# Altium PCB PCB.PcbDoc
Units mil, origin at the board's own origin, x right, y up, seen from the top; angles counter-clockwise.
Board outline 2615 x 3200 mil, 4 copper layers (Top Layer, Layer 1, Layer 2, Bottom Layer), stack 70.112 mil thick; 29 components, 50 nets, 138 pads, 19 vias.
Unrouted connection lines stored in the file: 1.
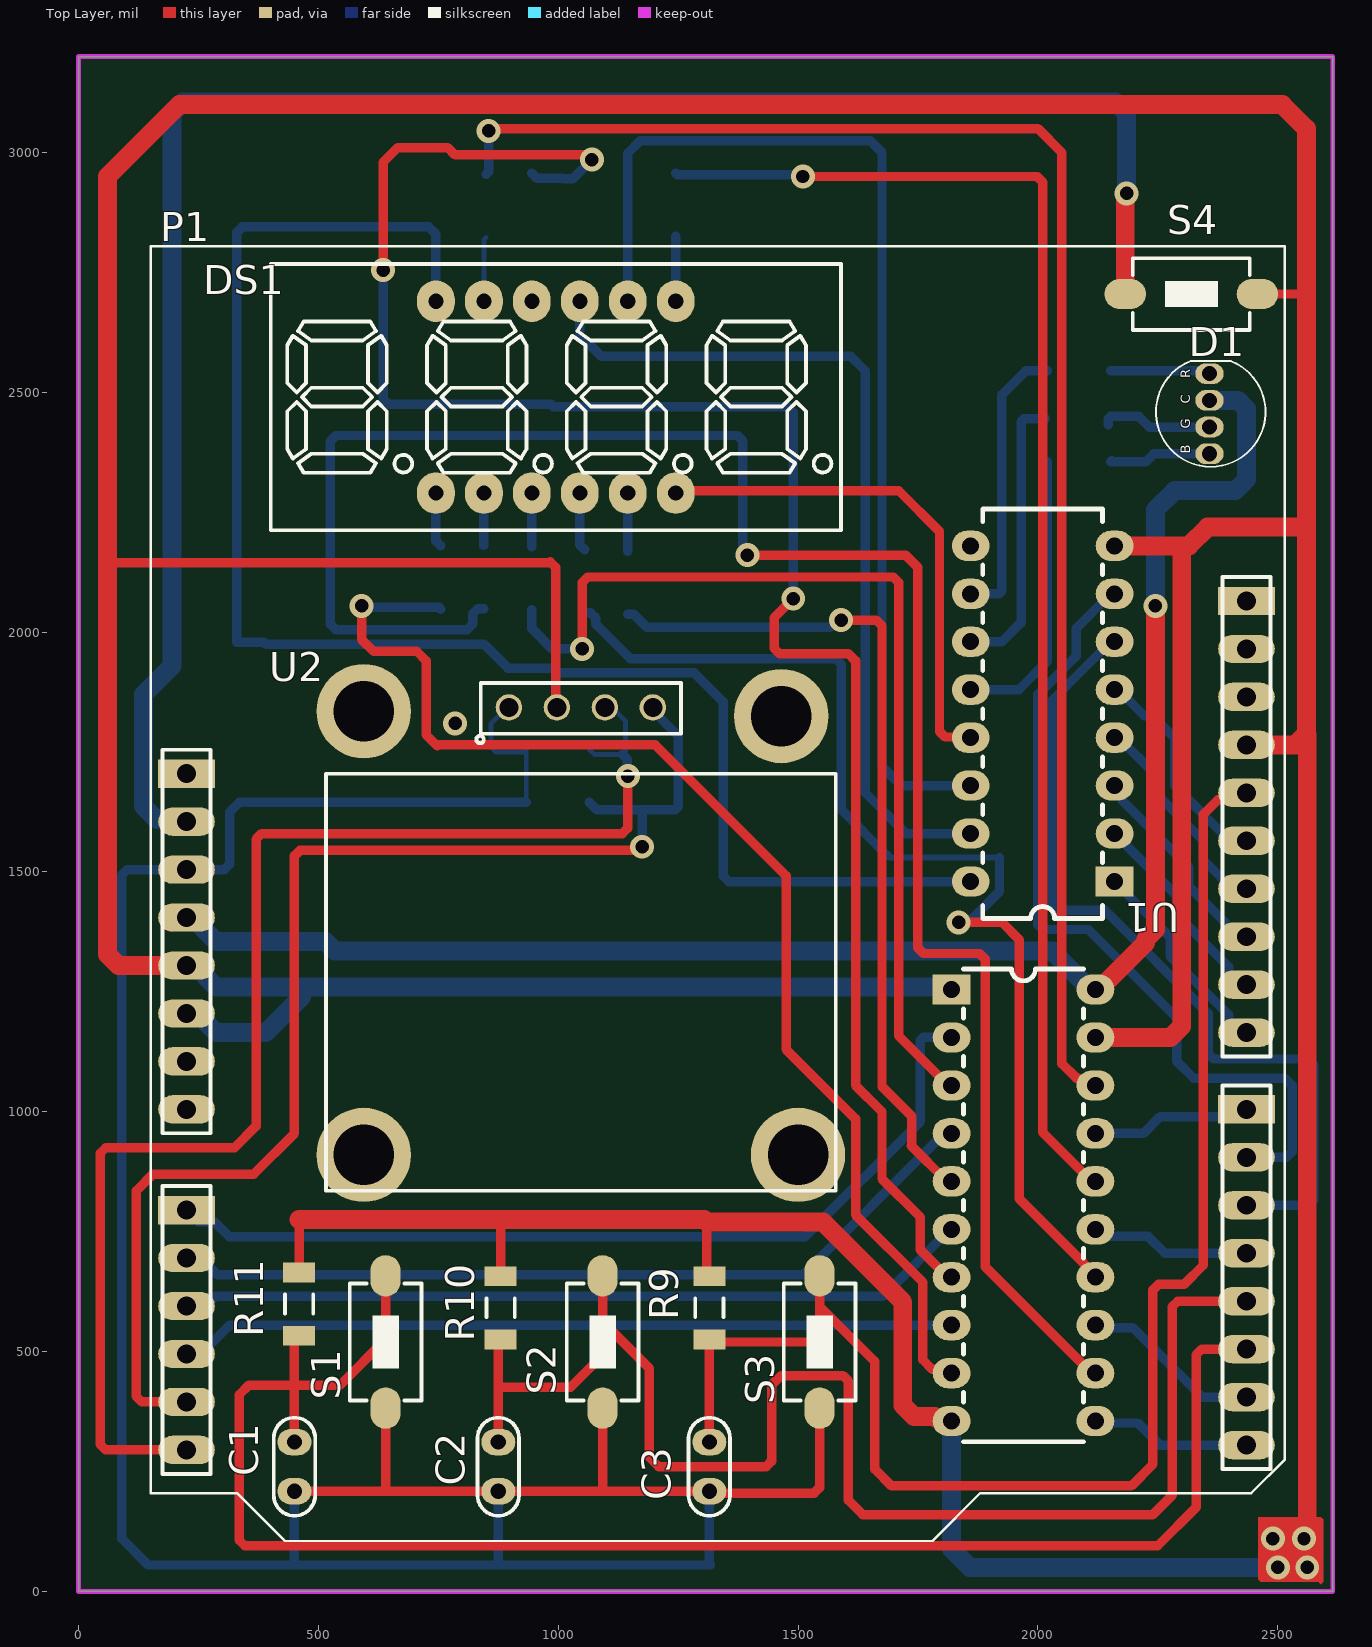
[diagram p0: Top Layer view]
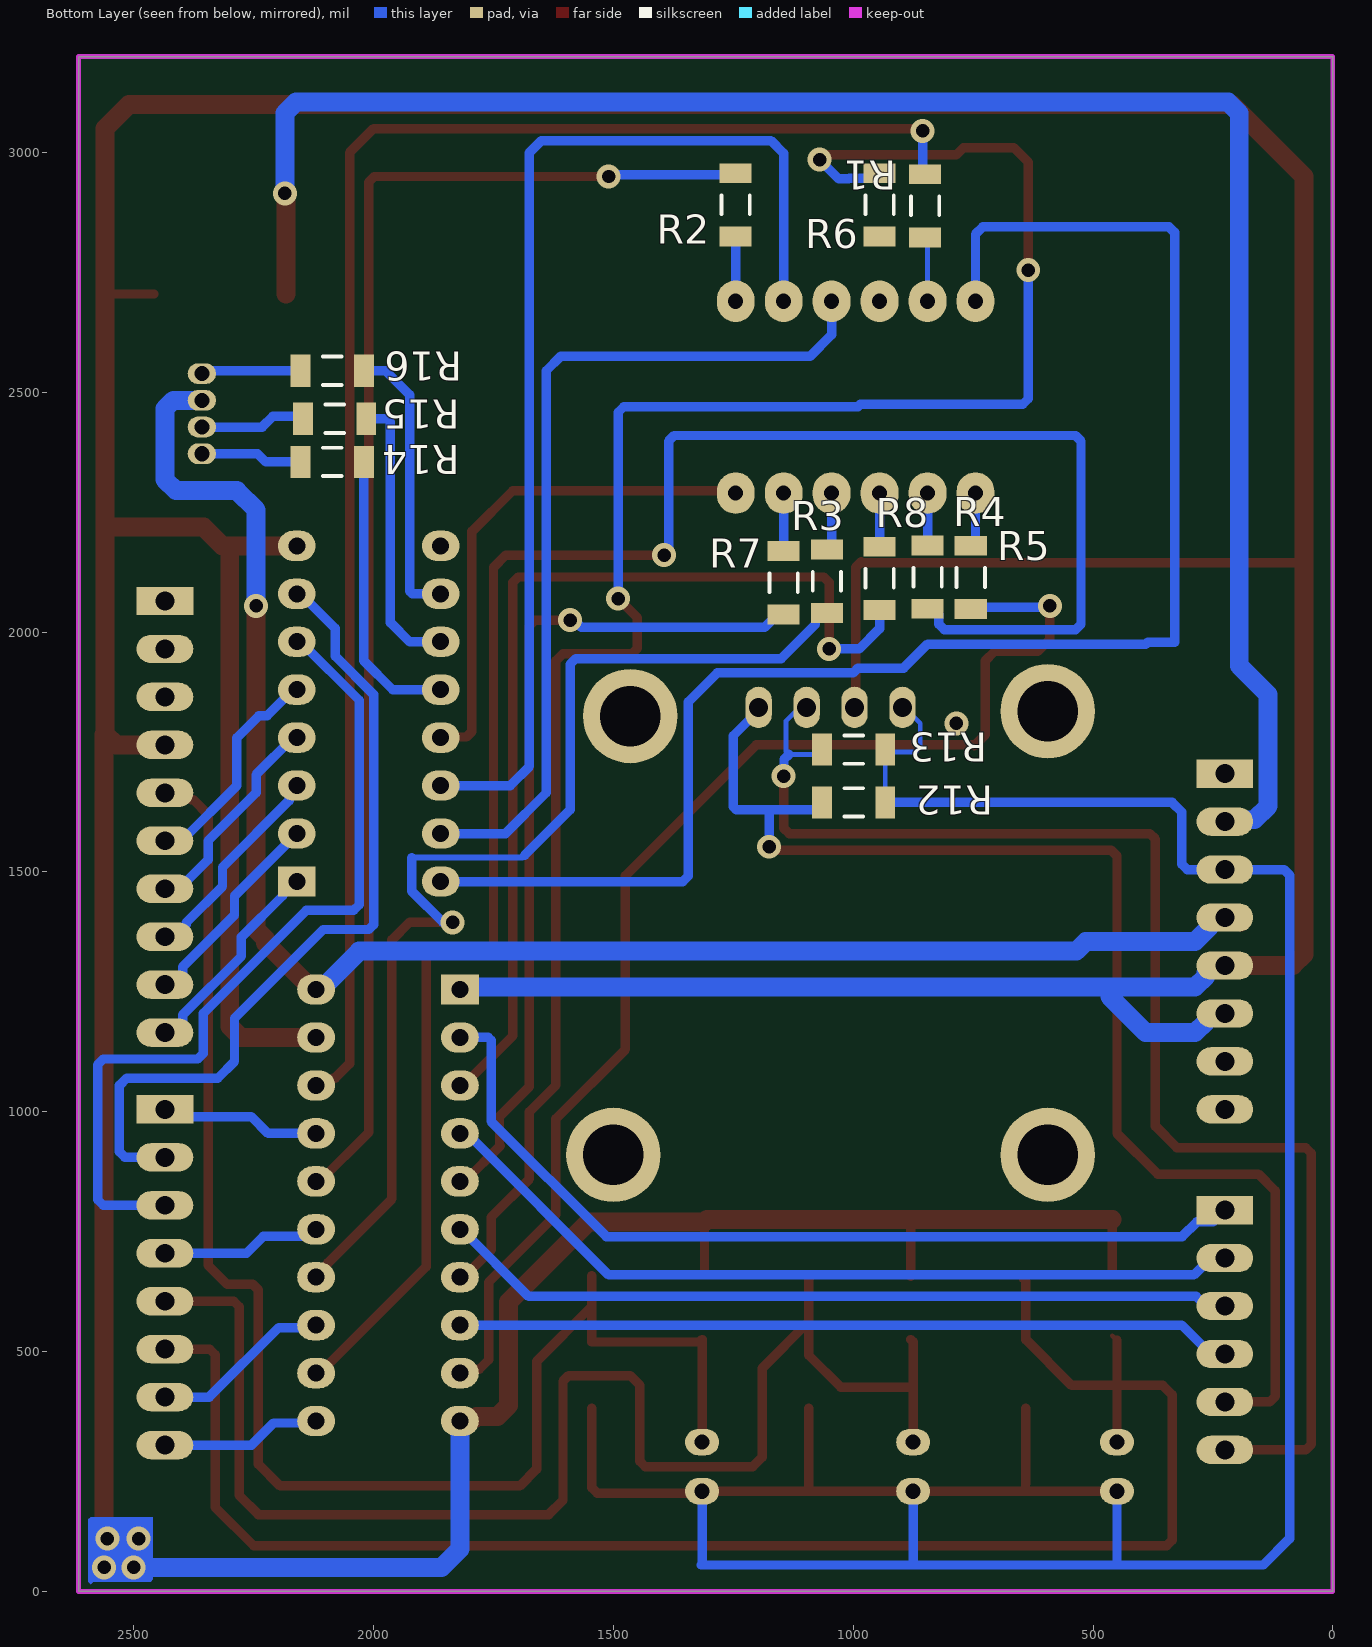
[diagram p1: Bottom Layer view, seen from below]
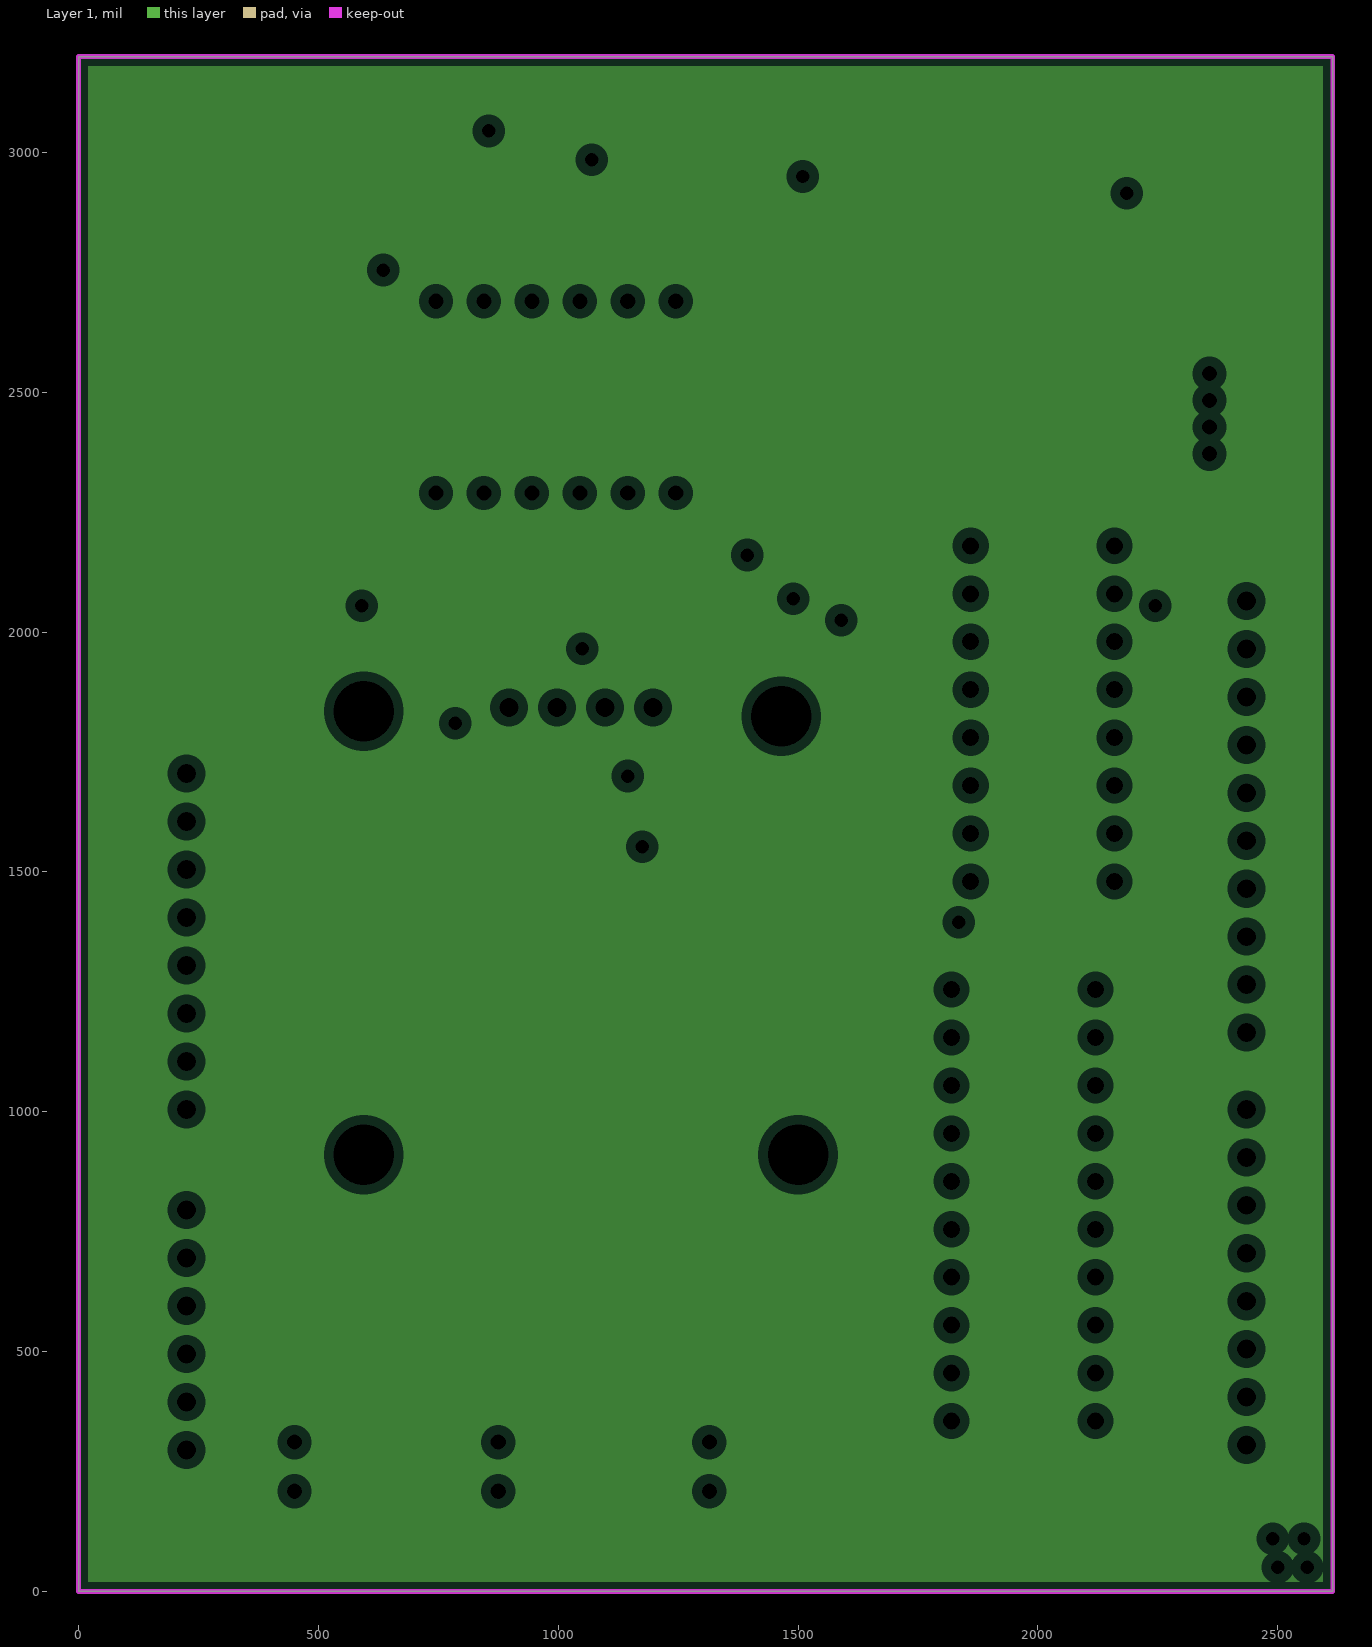
[diagram p2: Layer 1, clearances drawn from the general rule]
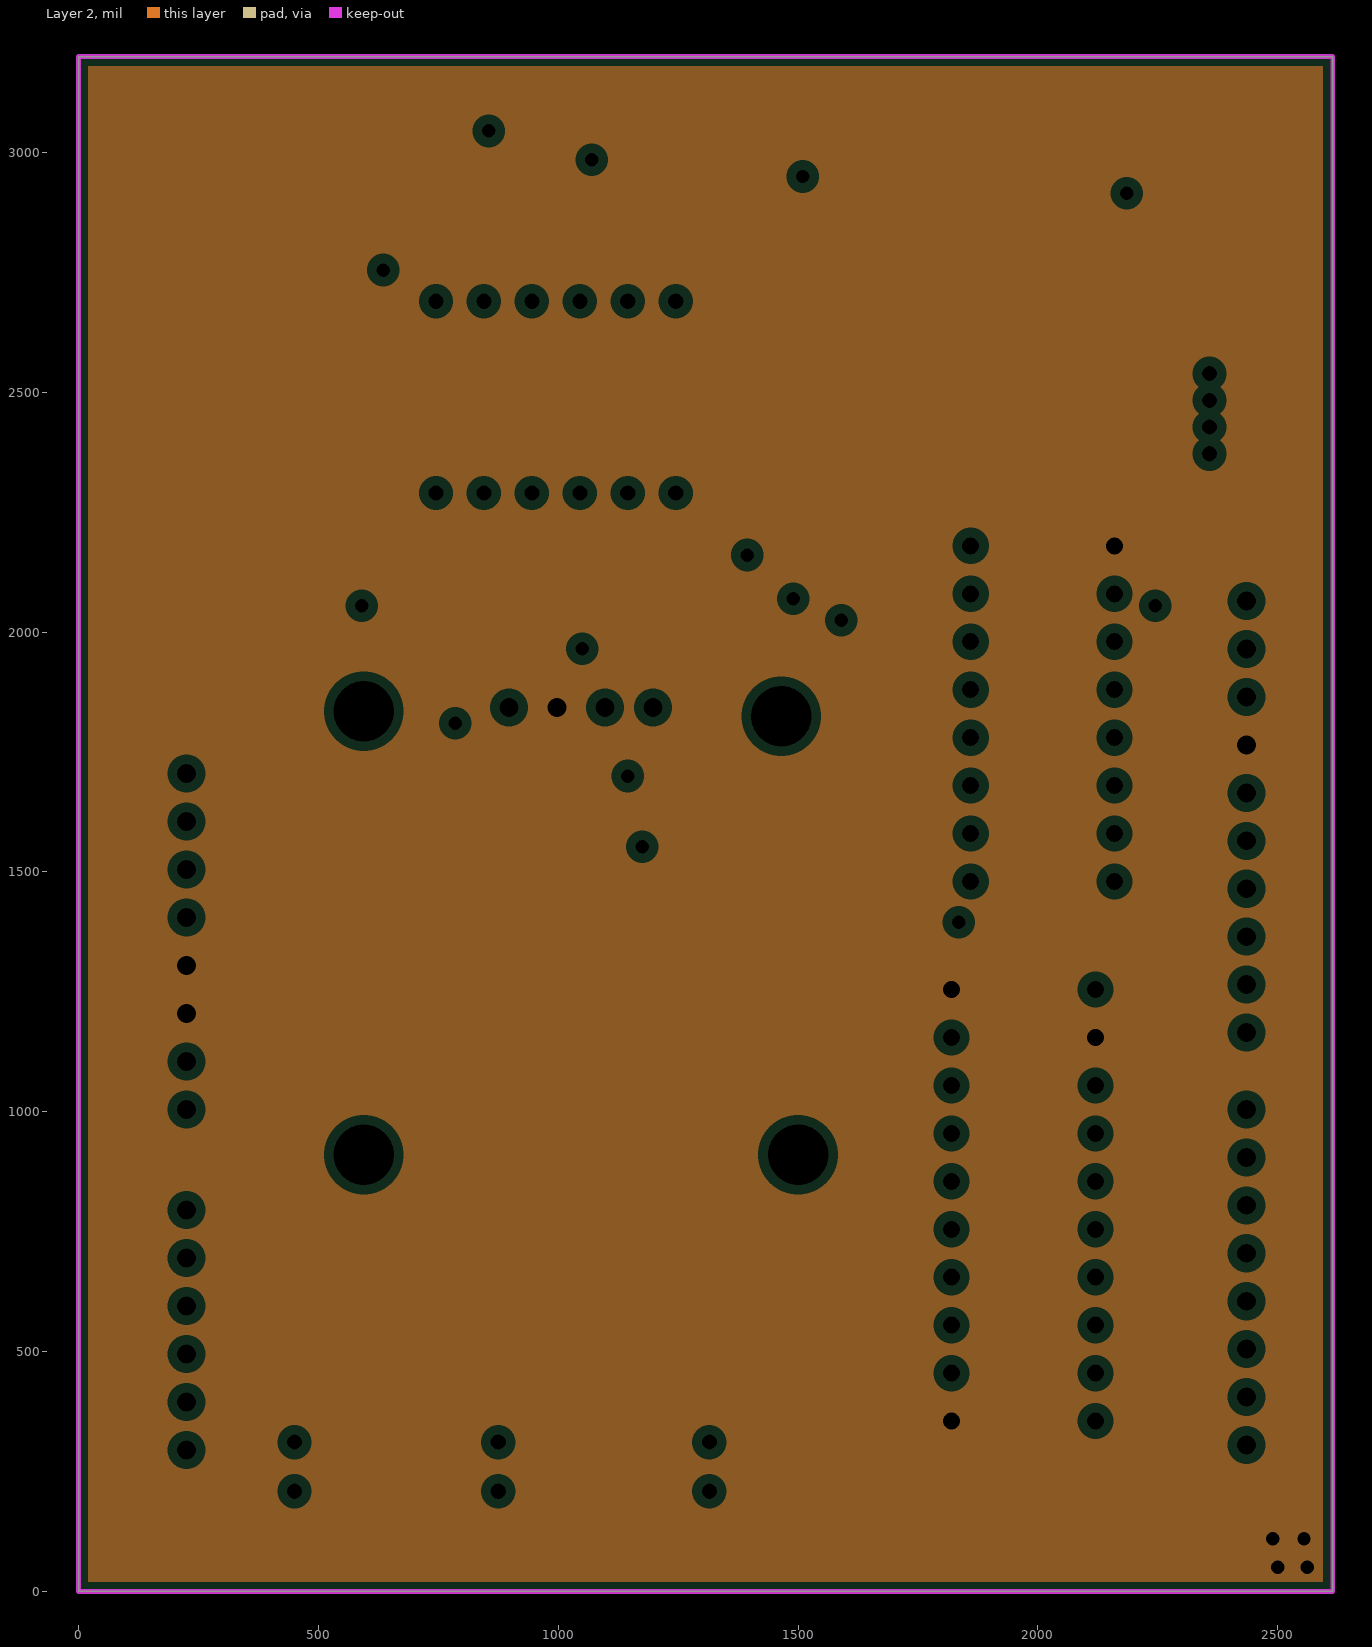
[diagram p3: Layer 2, clearances drawn from the general rule]

## Layer stack, top to bottom
Top Solder: solder mask 1, SM-001, Dk 4
Top Layer: signal copper 1.378
Dielectric 2: prepreg 2.8, PP-006, Dk 4.1
Layer 1: plane copper 1.378
Dielectric 1: core 59, Core-043, Dk 4.3
Layer 2: plane copper 1.378, net GND
Dielectric 3: prepreg 2.8, PP-006, Dk 4.1
Bottom Layer: signal copper 1.378
Bottom Solder: solder mask 1, SM-001, Dk 4

## Board outline
0,0 2615,0 2615,3200 0,3200

## Design rules (kind name [scope] priority, off if disabled: settings)
Clearance [All] p1: gap=10 ignorepadtopadclearanceinfootprint=FALSE except(0: Arc-Hole Track-Hole SMDPad-Hole THPad-Hole Via-Hole Fill-Hole Poly-Hole Region-Hole Text-Hole)
PlaneClearance [All] p1: clearance=20
PlaneConnect [All] p1: planeconnectstyle=Relief reliefexpansion=20 reliefentries=4 reliefconductorwidth=10 reliefairgap=10
PolygonConnect [All] p1: connectstyle=Relief reliefconductorwidth=10 reliefentries=4 polygonreliefangle="90 Angle" airgapwidth=10
RoomDefinition Sheet [InComponentClass('Sheet')] p1: confinementstyle=ConfineIn formatcopy=TRUE lockcomponents=FALSE outline 4725,-400 13375,-400 13375,2665 4725,2665
RoutingVias [All] p1: holewidth=28 width=50 viastyle="Through Hole" minholewidth=28 minwidth=50 maxholewidth=28 maxwidth=50
SolderMaskExpansion [All] p1: expansion=4 istentingtop=FALSE
Width [All] p1: maxlimit=100 minlimit=10 preferedwidth=10
28 further rules are at their usual default settings.

## Classes and differential pairs
component class Sheet: C3 D1 DS1 P1 R1 R2 R3 R4 R5 R6 R7 R8 R9 R10 R11 R12 R13 R14 S1 S2 S3 S4

## Components (designator, comment, footprint, x,y, rotation, side; value= is the part's Value field where it differs from the comment)
C1 "100nF" C_CER_D5 450,260 r90 top
C2 "100nF" C_CER_D5 875,260 r90 top
C3 "100nF" C_CER_D5 1315,260 r90 top
D1 "RGB" RGB_DIP 2360,2455 r90 top locked
DS1 "4Digit, Red" 7Seg-MPX4-30.2x14.1mm 995,2490 r0 top
P1 "UNO" Arduino_uno_U_1 1315,1365 r0 top locked
R1 "470" "RES 1206 (3216X08L)" 850,2940 r270 bottom value=Value?
R2 "470" "RES 1206 (3216X08L)" 1245,2942.05 r270 bottom value=Value?
R3 "470" "RES 1206 (3216X08L)" 1055,2055 r90 bottom value=Value?
R4 "470" "RES 1206 (3216X08L)" 845,2063.64 r90 bottom value=Value?
R5 "470" "RES 1206 (3216X08L)" 755,2062.95 r90 bottom value=Value?
R6 "470" "RES 1206 (3216X08L)" 945,2942.05 r270 bottom
R7 "470" "RES 1206 (3216X08L)" 1145,2051.95 r90 bottom
R8 "470" "RES 1206 (3216X08L)" 945,2061.18 r90 bottom
R9 "4.7k" "RES 1206 (3216X08L)" 1315,540 r90 top
R10 "4.7k" "RES 1206 (3216X08L)" 880,540 r90 top
R11 "4.7k" "RES 1206 (3216X08L)" 459.78,547.95 r90 top
R12 "4.7k" "RES 1206 (3216X08L)" 947.95,1645 r0 bottom
R13 "4.7k" "RES 1206 (3216X08L)" 947.95,1755 r0 bottom
R14 "470" "RES 1206 (3216X08L)" 2035,2355 r0 bottom
R15 "470" "RES 1206 (3216X08L)" 2030,2445 r0 bottom
R16 "470" "RES 1206 (3216X08L)" 2035,2545 r0 bottom
S1 "PB" SW_PB_SMD_2PIN_SPST_6X3X2 640,520 r90 top
S2 "PB" SW_PB_SMD_2PIN_SPST_6X3X2 1092.5,520 r90 top
S3 "PB" SW_PB_SMD_2PIN_SPST_6X3X2 1545,520 r90 top
S4 "PB" SW_PB_SMD_2PIN_SPST_6X3X2 2320,2705 r180 top locked
U1 "ULN2003" CDIP16 2010,1830 r180 top locked
U2 "OLED_SSD1306" OLED_SSD1306_64_I2C 1047.24,1843.07 r0 top locked
? "74HCT244" PDIP20 1970,805 r0 top locked

## Footprints (in the part's own frame and the unit in brackets; to place one, negate y for a bottom-side part, rotate by r counter-clockwise, add the part's x,y. Pads: shape width x height; smd on the part's side, far side on the other; paste and mask are expansions set on the pad)
7Seg-MPX4-30.2x14.1mm [mm] "Display, 12-Leads, Body 30/2x14/1mm"
  oval 2x2.2 hole 0.8: 1(-6.35,-5.08) 2(-3.81,-5.08) 3(-1.27,-5.08) 4(1.27,-5.08) 5(3.81,-5.08) 6(6.35,-5.08) 7(6.35,5.08) 8(3.81,5.08) 9(1.27,5.08) 10(-1.27,5.08) 11(-3.81,5.08) 12(-6.35,5.08)
  silkscreen extent -15.1,-7.05 15.1,7.05, body extent -15,-7 15,7, height 7.1
Arduino_uno_U_1 [mm]
  rect 3x1.5 hole 1: 1(-27.686,8.636) 9(-27.686,-14.478) 22(28.448,-9.144) 32(28.448,17.78)
  oval 3x1.5 hole 1: 2(-27.686,6.096) 3(-27.686,3.556) 4(-27.686,1.016) 5(-27.686,-1.524) 6(-27.686,-4.064) 7(-27.686,-6.604) 8(-27.686,-9.144) 10(-27.686,-17.018) 11(-27.686,-19.558) 12(-27.686,-22.098) 13(-27.686,-24.638) 14(-27.686,-27.178) 15(28.448,-26.924) 16(28.448,-24.384) 17(28.448,-21.844) 18(28.448,-19.304) 19(28.448,-16.764) 20(28.448,-14.224) 21(28.448,-11.684) 23(28.448,-5.08) 24(28.448,-2.54) 25(28.448,0) 26(28.448,2.54) 27(28.448,5.08) 28(28.448,7.62) 29(28.448,10.16) 30(28.448,12.7) 31(28.448,15.24)
  silkscreen extent -29.59,-32 30.48,36.58, body extent -28.96,-28.31 29.72,19.05, height 8.51
C_CER_D5 [mm] "CAP, CER, D:5mm, pitch: 2.5mm"
  oval 1.4x1.8 hole 0.8: 1(-1.3,0) 2(1.3,0)
  silkscreen extent -2.6,-1.1 2.6,1.1, body extent -2.46,-1 2.46,1, height 5.45
CDIP16 [mm] "16-Pin Ceramic DIP (DD16) NARROW_(300mil width) - 100mil pitch"
  rect 2x1.6 hole 0.9: 1(-3.81,8.89)
  oval 2x1.6 hole 0.9: 2(-3.81,6.35) 3(-3.81,3.81) 4(-3.81,1.27) 5(-3.81,-1.27) 6(-3.81,-3.81) 7(-3.81,-6.35) 8(-3.81,-8.89) 9(3.81,-8.89) 10(3.81,-6.35) 11(3.81,-3.81) 12(3.81,-1.27) 13(3.81,1.27) 14(3.81,3.81) 15(3.81,6.35) 16(3.81,8.89)
  silkscreen extent -3.18,-10.85 3.18,10.85, body extent -3.93,-10.79 3.94,10.79, height 4
OLED_SSD1306_64_I2C [mm] "OLED SS1306 Breakout, 128X64, I2C"
  round 1.4 / inner round 1.4 / far side oval 1.4x2.2 hole 1 mask+0.1: 1(-3.81,0) 2(-1.27,0) 3(1.27,0) 4(3.81,0)
  round 5 hole 3.2: ""(-11.5,-23.7) ""(-11.5,-0.2) ""(10.611,-0.459) ""(11.5,-23.7)
  silkscreen extent -13.5,-25.6 13.5,1.3, body extent -13.08,-25.74 13.62,2.12, height 13.97
PDIP20 [mm] "20-Pin Plastic DIP (DD20) NARROW_(300mil width) - 100mil pitch"
  rect 2x1.6 hole 0.9: 1(-3.81,11.43)
  oval 2x1.6 hole 0.9: 2(-3.81,8.89) 3(-3.81,6.35) 4(-3.81,3.81) 5(-3.81,1.27) 6(-3.81,-1.27) 7(-3.81,-3.81) 8(-3.81,-6.35) 9(-3.81,-8.89) 10(-3.81,-11.43) 11(3.81,-11.43) 12(3.81,-8.89) 13(3.81,-6.35) 14(3.81,-3.81) 15(3.81,-1.27) 16(3.81,1.27) 17(3.81,3.81) 18(3.81,6.35) 19(3.81,8.89) 20(3.81,11.43)
  silkscreen extent -3.17,-12.52 3.17,12.52, body extent -3.94,-12.51 3.94,12.51, height 3.76
"RES 1206 (3216X08L)" [mm] "Chip Resistor, 2-Leads, Body 3.2x1.6mm, IPC High Density _ (0.125 W)"
  rect 1.05x1.7 smd: 1(-0.377,0) 2(2.973,0)
  silkscreen extent 0.8,-0.75 1.8,0.75, body extent -0.23,-0.76 2.82,0.76, height 0.6
RGB_DIP [mm]
  oval 1.1x1.5 hole 0.8: 1(2.134,0.051) 2(0.72,0.051) 3(-0.694,0.051) 4(-2.108,0.051)
  silkscreen extent -2.8,-2.91 2.8,2.89, body extent -3,-3 2.6,3, height 8.09
SW_PB_SMD_2PIN_SPST_6X3X2 [mm] "SWITCH, PUSHBUTTON, SMD, SPST, 6X3.5X2.5mm, RS-282G05A3, SKQYPA, 50000 Cycles"
  oval 2.2x1.6 smd mask+0.1: 1(-3.5,0) 2(3.5,0)
  silkscreen extent -3.1,-1.9 3.1,1.9, body extent -3.4,-1.86 3.4,1.86, height 2.5

## Part data
C1 C2 C3: library part CAP_THD_CERML, "CAP, THD, CER MULTI LAYER,", ASSEMBLY=ASSEMBLY, DESC="CAP, CER MULTI LAYER,", MANF=MANF, MANF_P#=MANF_PART#, PARAM=50V, PARAM2=PARAM2, PRICE="100= 1$"
D1: library part Semi_LED_RGB_THT, "SMD 5050 LED RGB and Other", Package=Dip, Rating=5V, Inflow=5139, Type=CA, Validation=Valid
DS1: library part ModSen_7Seg_MPX4_Red_CA, "7Segment-MPX4-CA", Package=Package?, Rating=Rating?, Inflow=8134, Type=Type?, Validation=NT
P1: library part Con_Arduino_UNO_U, "Arduino uno up", Package=Package?, Rating=Rating?, Inflow=inflow?, Type=Type?, Validation=Valid
R1 R2 R3 R4 R5 R6 R7 R8 R9 R10 R11 R12 R13 R14 R15 R16: library part Res_SMD_1206, "Resistor", Package=1206, Rating=0.25W, Inflow=inflow?, Type=10%, Validation=Valid
S1 S2 S3 S4: library part SW_PushButton_2_SMD, "SMT Tactile ‎Switch", Package=SMD, Rating=2b, Inflow=8260, Type=Vertical, Validation=Valid
U1: library part IC_Driver_ULN2003, "Seven darlington array drivers", Package=SO-16, Rating=Rating?, Inflow=1506, Type=Driver, Validation=Valid
U2: library part OLED_SSD1306_64_I2C, "OLED, SSD1306, 0.96\", 128X64, BREAKOUT I2C", MANF=-, MANF_P#=OLED_SSD1306_I2C, PARAM="2 Colors, 0.96\", 128X64", PARAM2="3.3/5VCC, -20~70oC"
?: library part IC_Logic_74HCT244, "Octal Bus Buffer with 3 State Outputs (Non Inverted)", Package=Dip, Rating=8b, Inflow=1118, Type="3-State Non-Inverting", Validation=NT

## Via types
v1: diameter 50, hole 28, Top Layer to Bottom Layer, 19 vias

## Nets (pads, with @x,y where several pads share a name; then routed paths per layer and width w, separated by ;. In a path a pad name is that pad's centre, name@x,y a point inside that pad or via, vN(x,y) a via of type N, cw(c..) or ccw(c..) an arc to the next point about the centre after c; other vN are vias at no path point)
3.3: C1.1 C2.1 C3.1 P1.3 R12.1 R13.1 S1.1 S2.1 S3.1 U2.1 | length 5978.8
  Top Layer w19.68: C1.1 450,215 456.18,208.82 640.77,208.82 ; S1.1 640,225 640.77,224.23 640.77,208.82 ; S2.1 1092.5,211.3 1090.02,208.82 ; S3.1 1545,216.53 1533.47,205 1308.85,205 1305.04,208.82 1090.02,208.82 ; 640.77,208.82 C2.1 1090.02,208.82
  Bottom Layer w10: U2.1@895,1845 860,1810 860,1760 870,1750 928.11,1750 R13.1 933.11,1750 R12.1
  Bottom Layer w19.68: C1.1 450,55.8 449.2,55 ; C2.1 875,57.73 872.27,55 ; R12.1 335,1645 315,1625 315,1516.53 303.47,1505 P1.3 101.53,1505 90,1493.47 90,110 145,55 449.2,55 ; C3.1 1315,56.76 1316.76,55 872.27,55 ; 449.2,55 872.27,55
+5: ?.20 D1.2 P1.4 | length 3539.3
  Top Layer w39.37: P1.4@191.71,1395.91 200.8,1405 P1.4 ; ?.20 2127.87,1255 2225,1352.13 2225,1360 2245,1380 v1(2245,2055)
  Bottom Layer w39.37: P1.4@195.47,1405 P1.4 249.2,1405 258.29,1395.91 258.29,1384.14 287.43,1355 515,1355 535,1335 2030,1335 ?.20@2120,1245 ; v1(2245,2055) 2245,2255 2285,2295 2411.94,2295 2435,2318.06 2435,2465.8 2417.47,2483.33 D1.2
digit1: P1.26 U1.4 | length 450.8
  Bottom Layer w19.68: U1.4 2167.87,1780 2245,1702.87 2245,1665 2345,1565 2345,1525.47 2405.47,1465 P1.26
digit2: P1.25 U1.3 | length 440
  Bottom Layer w19.68: U1.3 2176.16,1663.84 2176.16,1648.84 2315,1510 2315,1470 2390.66,1394.34 2390.66,1390.46 2416.13,1365 P1.25
digit3: P1.24 U1.2 | length 439.8
  Bottom Layer w19.68: U1.2 2290,1450 2290,1410 2398.16,1301.84 2398.16,1283.19 2416.35,1265 P1.24
digit4: P1.23 U1.1 | length 444.4
  Bottom Layer w19.68: U1.1 2180,1460 2187.87,1460 2189.53,1458.35 2189.53,1450.47 2275.57,1364.43 2275.57,1324.43 2398.16,1201.84 2398.16,1183.19 2416.35,1165 P1.23
GND: ?.1 ?.10 ?.19 P1.5 P1.6 P1.29 R9.2 R10.2 R11.2 S4.1 U1.8 U2.2 | length 15432.1
  Top Layer w10: R9.2@1310,662.05 R9.2
  Top Layer w19.68: 50,2146.06 51.06,2145 75,2145 983.47,2145 ; R11.2 459.78,775.22 ; R10.2 880,775.22 880,775.54 880,778.45 ; 983.47,2146.53 995,2135 ; U2.2@995,1843.07 995,2133.47 ; R9.2@1310,662.05 1310,770 ; S4.1 2558.51,2705 2560,2706.49
  Top Layer w39.37: P1.5 83.06,1305 60,1328.06 60,2146.06 60,2950 210,3100 2510,3100 2560,3050 2560,2706.49 2560,2218.98 ; 459.78,775.22 880,775.22 ; 880,775.54 1304.46,775.54 1310,770 1552.17,770 1718.41,603.75 1718.41,388.06 1741.48,365 1785.42,365 1790.9,359.52 1815.48,359.52 ?.10 ; ?.19 2276.94,1155 2300,1178.06 2300,2180 ; U1.8 2315,2180 2353.98,2218.98 2560,2218.98 ; P1.29 2536.94,1765 2560,1788.06 ; v1(2561.72,50) 2561.72,110 2561.72,1786.34 2560,1788.06 ; 2560,1788.06 2560,2218.98
  Bottom Layer w39.37: P1.6 249.2,1205 264.37,1189.83 264.37,1188.06 287.43,1165 390,1165 465,1240 445,1260 ; P1.5 249.2,1305 264.37,1289.83 264.37,1283.06 287.43,1260 445,1260 ; ?.10 1820,88.06 1858.06,50 v1(2500.26,50) v1(2561.72,50) ; ?.1@1820,1260 445,1260
  other v1: 2490,110 2555,110
Net_3: ?.3 R8.1 | length 2067.6
  Top Layer w19.68: v1(1050,1965) 1050,2103.47 1061.53,2115 1698.47,2115 1710,2103.47 1710,1158.18 1813.18,1055 ?.3
  Bottom Layer w19.68: R8.1 945,2007.3 987.3,1965 v1(1050,1965)
Net_5: ?.5 R7.1 | length 1778.1
  Top Layer w19.68: v1(1590,2025) 1663.47,2025 1675,2013.47 1675,1052.49 1675,1052.41 1737.41,990 1737.41,931.16 1735.62,929.38 1810,855 ?.5
  Bottom Layer w19.68: R7.1 1157.8,2037.11 1184.9,2010 1566.8,2010 1581.8,2025 v1(1590,2025)
Net_7: ?.7 R6.1 | length 4026.3
  Top Layer w19.68: v1(635,2755) 635,2980 665,3010 770,3010 785,2995 1060,2995 v1(1070,2985) ; v1(1490,2070) 1450,2030 1450,1966.53 1461.53,1955 1605,1955 1620,1940 1620,1055 1675,1000 1675,860 1755,780 1755,712.13 1807.13,660 1815,660 ?.7
  Bottom Layer w19.68: v1(635,2755) 635,2486.53 646.53,2475 985,2475 990,2470 1478.47,2470 1490,2458.47 v1(1490,2070) ; R6.1 955.83,2946.06 1007.99,2946.06 1009.06,2945 1030,2945 v1(1070,2985)
Net_9: ?.9 R5.1 | length 2618.1
  Top Layer w19.68: v1(590,2055) 590,1985 615,1960 705,1960 725,1940 725,1785.68 747.84,1762.84 750,1765 1202.29,1765 1475,1492.29 1475,1130 1620,985 1620,785 1760,645 1760,482.87 1779.58,463.29 1811.71,463.29 ?.9
  Bottom Layer w19.68: v1(590,2055) 593.45,2051.55 751.55,2051.55 R5.1
Net_12: ?.12 R4.1 | length 4121.3
  Top Layer w19.68: v1(1394.24,2160.76) 1724.24,2160.76 1750,2135 1750,1341.53 1761.53,1330 1878.47,1330 1890,1318.47 1890,677.13 2112.13,455 ?.12
  Bottom Layer w19.68: R4.1 832.2,2048.8 821.38,2037.97 821.38,2016.53 809.85,2005 536.53,2005 525,2016.53 525,2398.47 536.53,2410 1373.47,2410 1385,2398.47 1385,2170 v1(1394.24,2160.76)
Net_14: ?.14 R3.1 | length 2354.6
  Top Layer w19.68: v1(1835,1395) 1925,1395 1961.68,1358.32 1961.68,818.32 2095.1,684.9 2095.1,683.75 2120,658.84 ?.14
  Bottom Layer w11.81: 1685,1535 1690,1530 1920,1530
  Bottom Layer w19.68: R3.1 1067.8,2040.16 1078.62,2029.33 1078.62,2016.54 1150.16,1945 1578.47,1945 1590,1933.47 1590,1630 1685,1535 ; v1(1835,1395) 1855.48,1395 1920,1459.52 1920,1530
Net_16: ?.16 R2.1 | length 2906.3
  Top Layer w19.68: v1(1510,2950) 1998.53,2950 2010.06,2938.47 2010.06,957.07 2112.13,855 ?.16
  Bottom Layer w19.68: R2.1 1248.45,2953.44 1506.55,2953.44 v1(1510,2950)
Net_18: ?.18 R1.1 | length 3298.4
  Top Layer w19.68: v1(855,3045) 860,3050 2000,3050 2050,3000 2050,1100.44 2080.32,1070.12 2085.29,1070.12 2100.41,1055 ?.18
  Bottom Layer w19.68: R1.1 855,2959.84 v1(855,3045)
NetD1_1: D1.1 R16.2 | length 208.4
  Bottom Layer w19.68: R16.2 2352,2545 D1.1
NetD1_3: D1.3 R15.2 | length 235.1
  Bottom Layer w19.68: R15.2@2147.05,2432.2 R15.2 2152.05,2450 2210,2450 2232.33,2427.67 D1.3
NetD1_4: D1.4 R14.2 | length 215.8
  Bottom Layer w19.68: R14.2@2154.05,2357 R14.2 2225,2355 2242,2372 D1.4
NetDS1_1: DS1.1 R5.2 | length 121.2
  Bottom Layer w19.68: DS1.1 740,2290 745,2285 745,2190 R5.2
NetDS1_2: DS1.2 R4.2 | length 109.3
  Bottom Layer w19.68: R4.2 DS1.2
NetDS1_3: DS1.3 R8.2 | length 111.8
  Bottom Layer w19.68: R8.2 DS1.3
NetDS1_4: DS1.4 R3.2 | length 122.1
  Bottom Layer w19.68: DS1.4 1045,2182.05 R3.2
NetDS1_5: DS1.5 R7.2 | length 121
  Bottom Layer w19.68: R7.2 DS1.5
NetDS1_6: DS1.6 U1.13 | length 1074.7
  Top Layer w19.68: DS1.6 1250,2295 1710,2295 1795,2210 1795,1792.87 1806.53,1781.34 1858.66,1781.34 U1.13
NetDS1_7: DS1.7 R2.2 | length 135
  Bottom Layer w19.68: DS1.7 R2.2
NetDS1_8: DS1.8 U1.14 | length 2341.4
  Bottom Layer w19.68: DS1.8 1145,2998.47 1171.53,3025 1650,3025 1675,3000 1675,1720 1715,1680 U1.14
NetDS1_9: DS1.9 U1.15 | length 1831.3
  Bottom Layer w19.68: DS1.9 1045,2620 1090,2575 1610,2575 1640,2545 1640,1665 1725,1580 U1.15
NetDS1_10: DS1.10 R6.2
NetDS1_11: DS1.11 R1.2 | length 135
  Bottom Layer w10: DS1.11 845,2817.95 R1.2
NetDS1_12: DS1.12 U1.16 | length 3369.7
  Bottom Layer w19.68: DS1.12 745,2830 730,2845 341.53,2845 330,2833.47 330,1979.11 385.89,1979.11 390,1975 845,1975 895,1925 990,1925 1000,1915 1283.47,1915 1343.99,1854.48 1343.99,1491.53 1355.52,1480 U1.16
NetR14_1: R14.1 U1.12 | length 607
  Bottom Layer w19.68: U1.12@1865,1875 U1.12 1865,1880 1960,1880 2020.16,1940.16 R14.1
NetR15_1: R15.1 U1.11 | length 593.3
  Bottom Layer w19.68: U1.11 1925,1980 1965,2020 1965,2439.14 1970.86,2445 R15.1
NetR16_1: R16.1 U1.10 | length 592.4
  Bottom Layer w19.68: U1.10 1919.14,2080 1925,2085.86 1925,2495 1975,2545 R16.1
reset: P1.2 S4.2 | length 3960.1
  Top Layer w39.37: S4.2 2182.2,2912.2 v1(2185,2915)
  Bottom Layer w39.37: P1.2 221.23,1608.77 163.42,1608.77 135,1637.19 135,1870 195,1930 195,3081.94 218.06,3105 2161.94,3105 2185,3081.94 v1(2185,2915)
RGBB: P1.27 U1.5 | length 464.1
  Bottom Layer w19.68: U1.5 2167.87,1880 2222.02,1825.86 2239.14,1825.86 2285,1780 2285,1680 2400,1565 P1.27
RGBG: P1.21 U1.7 | length 1720.6
  Bottom Layer w19.68: U1.7 2152.13,2080 2080,2007.87 2080,1950 2000,1870 2000,1390 2010,1380 2105,1380 2290,1195 2290,1105 2325,1070 2515,1070 2530,1055 2530,916.53 2518.47,905 P1.21
RGBR: P1.20 U1.6 | length 1765.5
  Bottom Layer w19.68: U1.6 2152.13,1980 2030,1857.87 2030,1431.53 2041.53,1420 2140,1420 2355,1205 2355,1121.53 2366.53,1110 2563.47,1110 2575,1098.47 2575,816.53 2563.47,805 P1.20
scl: P1.14 R13.2 U2.3 | length 2890.5
  Top Layer w19.68: P1.14 56.53,295 45,306.53 45,913.47 56.53,925 325,925 370,970 370,1568.47 381.53,1580 1133.47,1580 1145,1591.53 v1(1145,1700)
  Bottom Layer w10: R13.2 1075,1745 1134.14,1745 1140,1750.86 1140,1815 U2.3@1095,1860
  Bottom Layer w19.68: 1134.14,1745 1144.26,1734.89 1144.26,1700.74 v1(1145,1700)
sda: P1.13 R12.2 U2.4 | length 2740.7
  Top Layer w19.68: P1.13 131.53,395 120,406.53 120,835 155,870 365,870 450,955 450,1533.47 461.53,1545 1180,1545 1179.91,1545.09 1179.91,1552.57 v1(1175.12,1552.57)
  Bottom Layer w19.68: R12.2 1080,1630 1175.12,1630 ; v1(1175.12,1552.57) 1175.12,1630 ; U2.4@1195,1839.15 1250,1784.15 1250,1635.86 1244.14,1630 1175.12,1630
seg1: ?.2 P1.9 | length 1891.4
  Bottom Layer w19.68: P1.9 249.53,770.47 283.37,770.47 314.18,739.66 1514.66,739.66 1755,980 1755,1149.14 1760.86,1155 ?.2 ?.2@1820,1152.65
seg2: ?.4 P1.10 | length 1716.7
  Bottom Layer w10: ?.4 ?.4@1828.75,946.25
  Bottom Layer w19.68: P1.10 254.53,695 289.53,660 1510,660 ?.4@1796.25,946.25
seg3: ?.6 P1.11 | length 1661.3
  Bottom Layer w19.68: P1.11 264.91,595 284.91,615 1676.85,615 1816.85,755 ?.6
seg4: ?.8 P1.12 | length 1619.9
  Bottom Layer w19.68: P1.12 254.53,495 314.53,555 ?.8
seg5: ?.11 P1.15 | length 335.7
  Bottom Layer w19.68: ?.11 2123.9,351.1 2208.49,351.1 2209.8,349.8 2254.59,305 P1.15
seg6: ?.13 P1.16 | length 377.1
  Bottom Layer w19.68: ?.13 2125,550 2197.87,550 2342.87,405 P1.16
seg7: ?.15 P1.19 | length 332.8
  Bottom Layer w19.68: ?.15@2125,760 2145,740 2230,740 2265,705 P1.19
seg8: ?.17 P1.22 | length 335.7
  Bottom Layer w19.68: ?.17 2220,955 2255,990 2420,990 P1.22
sw1: C1.2 P1.17 R11.1 S1.2 | length 3480.2
  Top Layer w10: R11.1@450,523.33 R11.1 ; S1.2 S1.2@645,652.8
  Top Layer w19.68: C1.2 450,429.51 ; R11.1@450,523.33 450,429.51 ; S1.2@645,652.8 640,647.8 640,525 544.51,429.51 450,429.51 ; P1.17 2341.53,505 2330,493.47 2330,175 2250,95 346.53,95 335,106.53 335,410 354.51,429.51 450,429.51
sw2: C2.2 P1.18 R10.1 S2.2 | length 3058.5
  Top Layer w19.68: C2.2 875,425.52 ; R10.1 875,520.16 875,425.52 ; S2.2@1090,655.3 S2.2 1092.5,562.5 ; P1.18 2291.53,605 2280,593.47 2280,200 2240,160 1635,160 1605,190 1605,438.47 1593.47,450 1465,450 1445,430 1445,271.53 1433.47,260 1209.68,260 1190,279.68 1190,465 1092.5,562.5 ; 875,425.52 1025.52,425.52 1092.5,492.5 1092.5,562.5
sw3: C3.2 P1.28 R9.1 S3.2 | length 3129.6
  Top Layer w10: P1.28@2430,1665 2435,1670 P1.28
  Top Layer w19.68: C3.2 R9.1 1320.16,520 1545,520 1545,594.41 ; S3.2 1545,594.41 ; P1.28@2430,1665 2394.82,1665 2380.48,1650.66 2375.66,1650.66 2345,1620 2345,680 2305,640 2251.53,640 2240,628.47 2240,265 2195,220 1695,220 1660,255 1660,479.41 1545,594.41
pads on no net: P1.1 P1.7 P1.8 P1.30 P1.31 P1.32 U1.9 U2.
copper on no net:
  other v1: 785,1810

## Polygon pours and split planes (outlines as drawn)
no net on Layer 1 (split plane): 2594.9,20.1 20.1,20.1 20.1,3179.9 2594.9,3179.9
GND on Layer 2 (split plane): 2594.9,20.1 20.1,20.1 20.1,3179.9 2594.9,3179.9

## Keep-outs
Keep-Out Layer:
  the board outline again, w10

## Other copper
Top Layer:
  region net GND: 2460,155 2460,25 2465,20 2585,20 2590,15 2595,20 2595,150 2590,155
Bottom Layer:
  region net GND: 2460,155 2460,25 2465,20 2585,20 2590,15 2595,20 2595,150 2590,155
  region: 2490,150

## Text inside footprints (layer, text, board x,y; h text height)
D1: Top Overlay "B" at 2318,2372 h19.68 r90; Top Overlay "G" at 2318,2424.33 h19.68 r90; Top Overlay "C" at 2318,2476.67 h19.68 r90; Top Overlay "R" at 2318,2529 h19.68 r90